# Altium PCB ee107_mcu_fpga_connector_board.PcbDoc
Units mil, origin at the board's own origin, x right, y up, seen from the top; angles counter-clockwise.
Board outline 3135 x 2800 mil, 2 copper layers (Top Layer, Bottom Layer); 4 components, 27 nets, 50 pads, 0 vias.
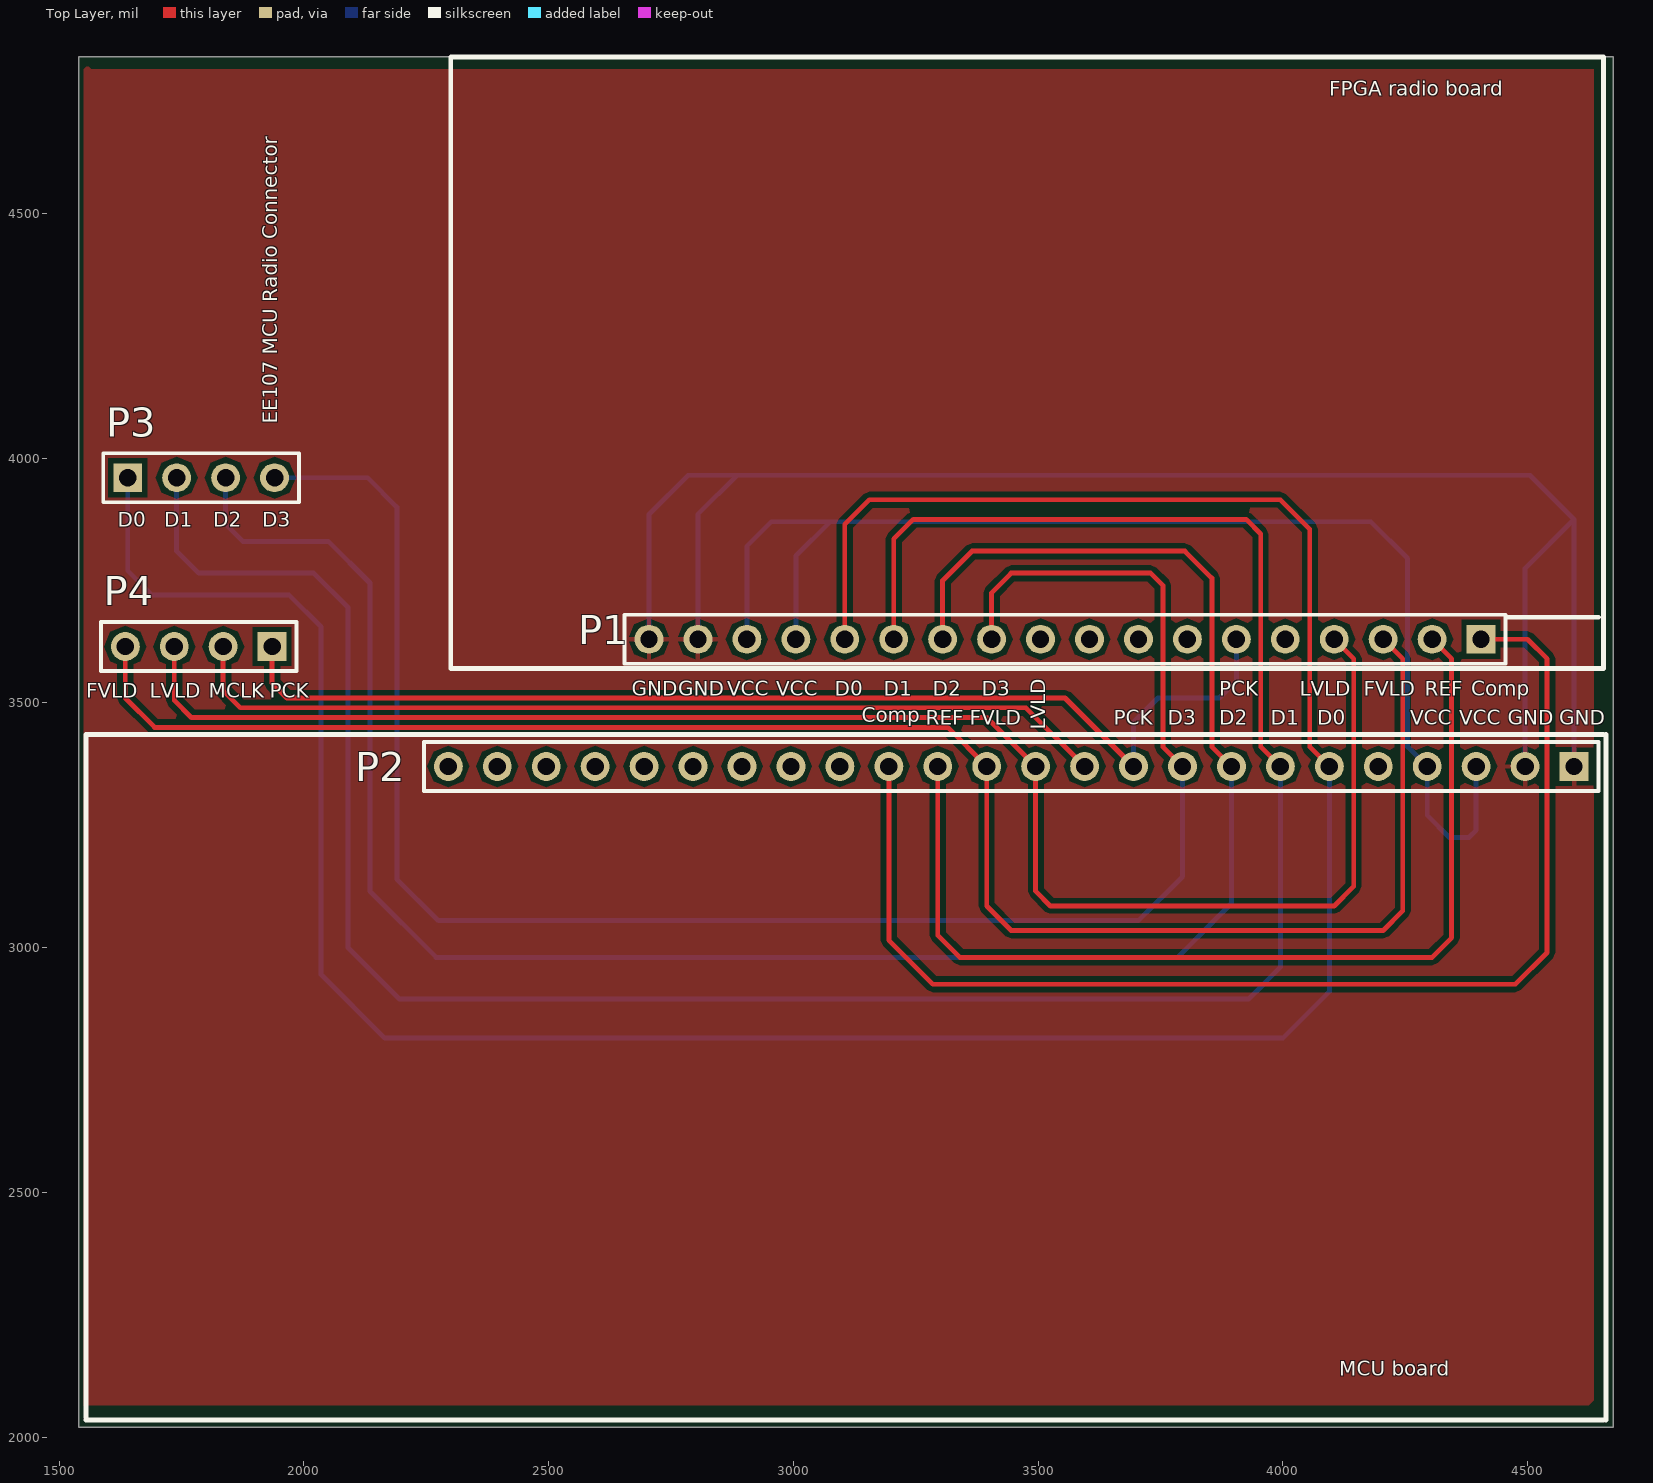
[diagram p0: Top Layer view]
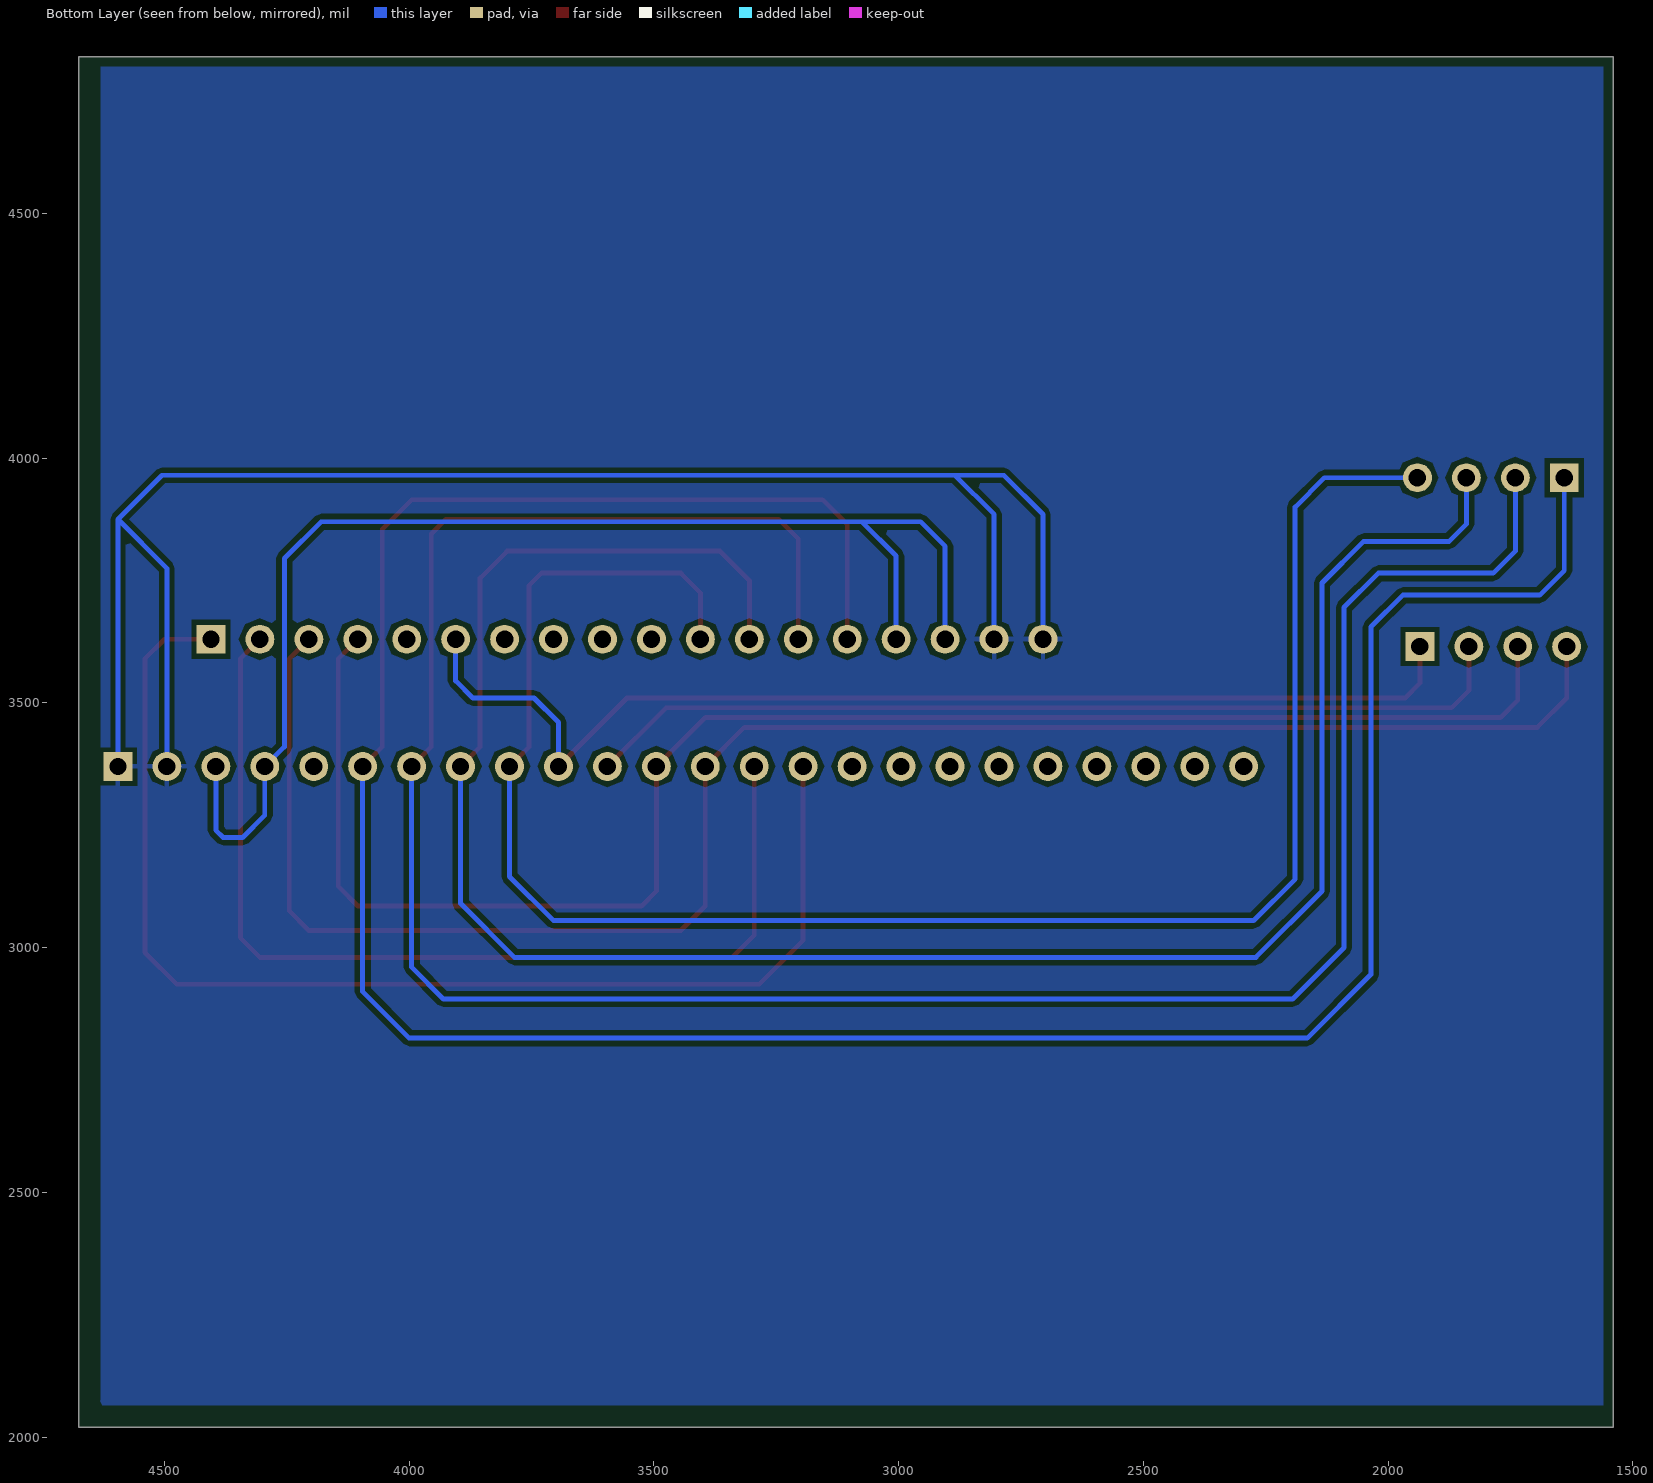
[diagram p1: Bottom Layer view, seen from below]

## Layer stack, top to bottom
Top Solder: solder mask 0.4, Solder Resist, Dk 3.5
Top Layer: signal copper 1.4
Dielectric 1: dielectric 12.6, FR-4, Dk 4.8
Bottom Layer: signal copper 1.4
Bottom Solder: solder mask 0.4, Solder Resist, Dk 3.5

## Board outline
1540,2020 4675,2020 4675,4820 1540,4820

## Design rules (kind name [scope] priority, off if disabled: settings)
Clearance [All] p1: gap=10 ignorepadtopadclearanceinfootprint=FALSE except(0: Arc-Hole Track-Hole SMDPad-Hole THPad-Hole Via-Hole Fill-Hole Poly-Hole Region-Hole Text-Hole)
PolygonConnect [All] p1: connectstyle=Relief reliefconductorwidth=10 reliefentries=4 polygonreliefangle="90 Angle" airgapwidth=10
RoutingVias [All] p1: holewidth=28 width=50 viastyle="Through Hole" minholewidth=28 minwidth=50 maxholewidth=28 maxwidth=50
SolderMaskExpansion [All] p1: expansion=4
Width [All] p1: maxlimit=10 minlimit=10 preferedwidth=10
30 further rules are at their usual default settings.

## Components (designator, comment, footprint, x,y, rotation, side; value= is the part's Value field where it differs from the comment)
P1 "Header 18" HDR1X18 4405,3630 r180 top
P2 "Header 24" HDR1X24 4595,3370 r180 top
P3 "Header 4" HDR1X4 1640,3960 r0 top
P4 "Header 4" HDR1X4 1935,3615 r180 top

## Footprints (in the part's own frame and the unit in brackets; to place one, negate y for a bottom-side part, rotate by r counter-clockwise, add the part's x,y. Pads: shape width x height; smd on the part's side, far side on the other; paste and mask are expansions set on the pad)
HDR1X4 [mm] "Connector; Header; 4 Position"
  rect 1.5x1.5 hole 0.9: 1(0,0)
  round 1.5 hole 0.9: 2(2.54,0) 3(5.08,0) 4(7.62,0)
  silkscreen extent -1.27,-1.27 8.89,1.27
HDR1X18 [mm] "Connector; Header; 18 Position"
  rect 1.5x1.5 hole 0.9: 1(0,0)
  round 1.5 hole 0.9: 2(2.54,0) 3(5.08,0) 4(7.62,0) 5(10.16,0) 6(12.7,0) 7(15.24,0) 8(17.78,0) 9(20.32,0) 10(22.86,0) 11(25.4,0) 12(27.94,0) 13(30.48,0) 14(33.02,0) 15(35.56,0) 16(38.1,0) 17(40.64,0) 18(43.18,0)
  silkscreen extent -1.27,-1.27 44.45,1.27
HDR1X24 [mm] "Connector; Header; 24 Position"
  rect 1.5x1.5 hole 0.9: 1(0,0)
  round 1.5 hole 0.9: 2(2.54,0) 3(5.08,0) 4(7.62,0) 5(10.16,0) 6(12.7,0) 7(15.24,0) 8(17.78,0) 9(20.32,0) 10(22.86,0) 11(25.4,0) 12(27.94,0) 13(30.48,0) 14(33.02,0) 15(35.56,0) 16(38.1,0) 17(40.64,0) 18(43.18,0) 19(45.72,0) 20(48.26,0) 21(50.8,0) 22(53.34,0) 23(55.88,0) 24(58.42,0)
  silkscreen extent -1.27,-1.27 59.69,1.27

## Part data
P1: "Header, 18-Pin", LatestRevisionDate=17-Jul-2002, LatestRevisionNote="Re-released for DXP Platform.", Publisher="Altium Limited"
P2: "Header, 24-Pin", LatestRevisionDate=17-Jul-2002, LatestRevisionNote="Re-released for DXP Platform.", Publisher="Altium Limited"
P3 P4: "Header, 4-Pin", LatestRevisionDate=17-Jul-2002, LatestRevisionNote="Re-released for DXP Platform.", Publisher="Altium Limited"

## Nets (pads, with @x,y where several pads share a name; then routed paths per layer and width w, separated by ;. In a path a pad name is that pad's centre, name@x,y a point inside that pad or via, vN(x,y) a via of type N, cw(c..) or ccw(c..) an arc to the next point about the centre after c; other vN are vias at no path point)
comparator: P1.1 P2.15 | length 2515.8
  Top Layer w10: P2.15 3195,3015 3285,2925 4475,2925 4540,2990 4540,3590 4500,3630 P1.1
D0: P1.14 P2.6 P3.1 | length 5688
  Top Layer w10: P1.14 3105,3865 3155,3915 3995,3915 4055,3855 4055,3410 P2.6
  Bottom Layer w10: P3.1 1640,3770 1690,3720 1970,3720 2035,3655 2035,2945 2165,2815 4000,2815 4095,2910 P2.6
D1: P1.13 P2.7 P3.2 | length 5103.6
  Top Layer w10: P1.13 3205,3835 3245,3875 3925,3875 3955,3845 3955,3410 P2.7
  Bottom Layer w10: P3.2 1740,3810 1785,3765 2020,3765 2090,3695 2090,3000 2195,2895 3930,2895 3995,2960 P2.7
D2: P1.12 P2.8 P3.3 | length 4330.4
  Top Layer w10: P1.12 3305,3750 3365,3810 3800,3810 3855,3755 3855,3410 P2.8
  Bottom Layer w10: P3.3 1840,3865 1875,3830 2050,3830 2135,3745 2135,3115 2270,2980 3785,2980 3895,3090 P2.8
D3: P1.11 P2.9 P3.4 | length 3795.8
  Top Layer w10: P1.11 3405,3725 3445,3765 3730,3765 3755,3740 3755,3410 P2.9
  Bottom Layer w10: P3.4 2130,3960 2190,3900 2190,3140 2275,3055 3705,3055 3795,3145 P2.9
FPGA_D4: P1.10
FPGA_D5: P1.9
FPGA_D6: P1.8
FPGA_D7: P1.7
FPGA_HS: P1.4 P2.12 P4.3 | length 3381.5
  Top Layer w10: P4.3 1735,3505 1770,3470 3395,3470 P2.12 3495,3115 3525,3085 4105,3085 4145,3125 4145,3590 P1.4
FPGA_PCK: P1.6 P2.10 P4.1 | length 2325.6
  Top Layer w10: P4.1 1935,3540 1965,3510 3555,3510 P2.10
  Bottom Layer w10: P2.10 3695,3460 3745,3510 3870,3510 3905,3545 P1.6
FPGA_VS: P1.3 P2.13 P4.4 | length 3666.8
  Top Layer w10: P4.4 1635,3510 1695,3450 3315,3450 P2.13 3395,3085 3445,3035 4205,3035 4245,3075 4245,3590 P1.3
FPGA_XCK: P1.5
GND: P1.17 P1.18 P2.1 P2.2 | length 3635
  Bottom Layer w10: P1.18 2705,3885 2785,3965 2885,3965 ; P1.17 2805,3885 2885,3965 ; P2.2 4495,3775 4595,3875 ; P2.1 4595,3875 ; 2885,3965 4505,3965 4595,3875
INT: P2.5
MCLK: P2.11 P4.2 | length 1914.2
  Top Layer w10: P4.2 1835,3525 1870,3490 3475,3490 P2.11
MIC_D0: P2.17
MIC_D1: P2.18
MIC_D2: P2.19
MIC_D3: P2.20
MIC_D4: P2.21
MIC_D5: P2.22
MIC_D6: P2.23
MIC_D7: P2.24
ref_vol: P1.2 P2.14 | length 2056.8
  Top Layer w10: P2.14 3295,3025 3340,2980 4305,2980 4345,3020 4345,3590 P1.2
TRIG: P2.16
VCC: P1.15 P1.16 P2.3 P2.4 | length 2657.2
  Bottom Layer w10: P1.16 2905,3820 2955,3870 3075,3870 ; P1.15 3005,3800 3075,3870 ; P2.3 4395,3240 4380,3225 4340,3225 4295,3270 P2.4 4255,3410 4255,3795 4180,3870 3075,3870

## Polygon pours and split planes (outlines as drawn)
GND on Bottom Layer "GND" (solid, pour order 0): 1560,4800 1560,2065 4640,2065 4630,2075 4630,4800
GND on Top Layer "GND" (solid, pour order 2): 1555,4800 1550,4795 1550,2065 4625,2065 4635,2075 4635,4795 1565,4795 1560,4800

## Silkscreen, mask and mechanical layers (free items; w line width, h text height)
Top Overlay:
  lines w10: 1555,2035 4655,2035 ; 1555,2040 1555,3435 4655,3435 ; 4460,3675 4645,3675 ; 4660,2035 4660,3435 ; 2300,3570 2300,4820 4655,4820 4655,3570 2300,3570
  text "FPGA radio board" at 4095,4740 h30
  text "EE107 MCU Radio Connector" at 1945,4070 h30 r90
  text "D0" at 1620,3860 h30
  text "D1" at 1715,3860 h30
  text "D2" at 1815,3860 h30
  text "D3" at 1915,3860 h30
  text "GND" at 2670,3515 h30
  text "GND" at 2765,3515 h30
  text "VCC" at 2865,3515 h30
  text "VCC" at 2965,3515 h30
  text "D0" at 3085,3515 h30
  text "D1" at 3185,3515 h30
  text "D2" at 3285,3515 h30
  text "D3" at 3385,3515 h30
  text "PCK" at 3870,3515 h30
  text "LVLD" at 4035,3515 h30
  text "FVLD" at 4165,3515 h30
  text "REF" at 4290,3515 h30
  text "Comp" at 4385,3515 h30
  text "FVLD" at 1555,3510 h30
  text "LVLD" at 1685,3510 h30
  text "MCLK" at 1805,3510 h30
  text "PCK" at 1930,3510 h30
  text "Comp" at 3140,3460 h30
  text "REF" at 3270,3455 h30
  text "FVLD" at 3360,3455 h30
  text "PCK" at 3655,3455 h30
  text "D3" at 3765,3455 h30
  text "D2" at 3870,3455 h30
  text "D1" at 3975,3455 h30
  text "D0" at 4070,3455 h30
  text "VCC" at 4260,3455 h30
  text "VCC" at 4360,3455 h30
  text "GND" at 4460,3455 h30
  text "GND" at 4565,3455 h30
  text "LVLD" at 3515,3445 h30 r90
  text "MCU board" at 4115,2125 h30
Mechanical 1:
  lines w10: 1540,4815 4670,4815 4670,2030 1540,2030 1540,4820